# Altium PCB frontpanel.PcbDoc
Units mil, origin at the board's own origin, x right, y up, seen from the top; angles counter-clockwise.
Board outline 5533.65 x 2545.46 mil, 2 copper layers (Top Layer, Bottom Layer); 17 components, 16 nets, 69 pads, 8 vias.
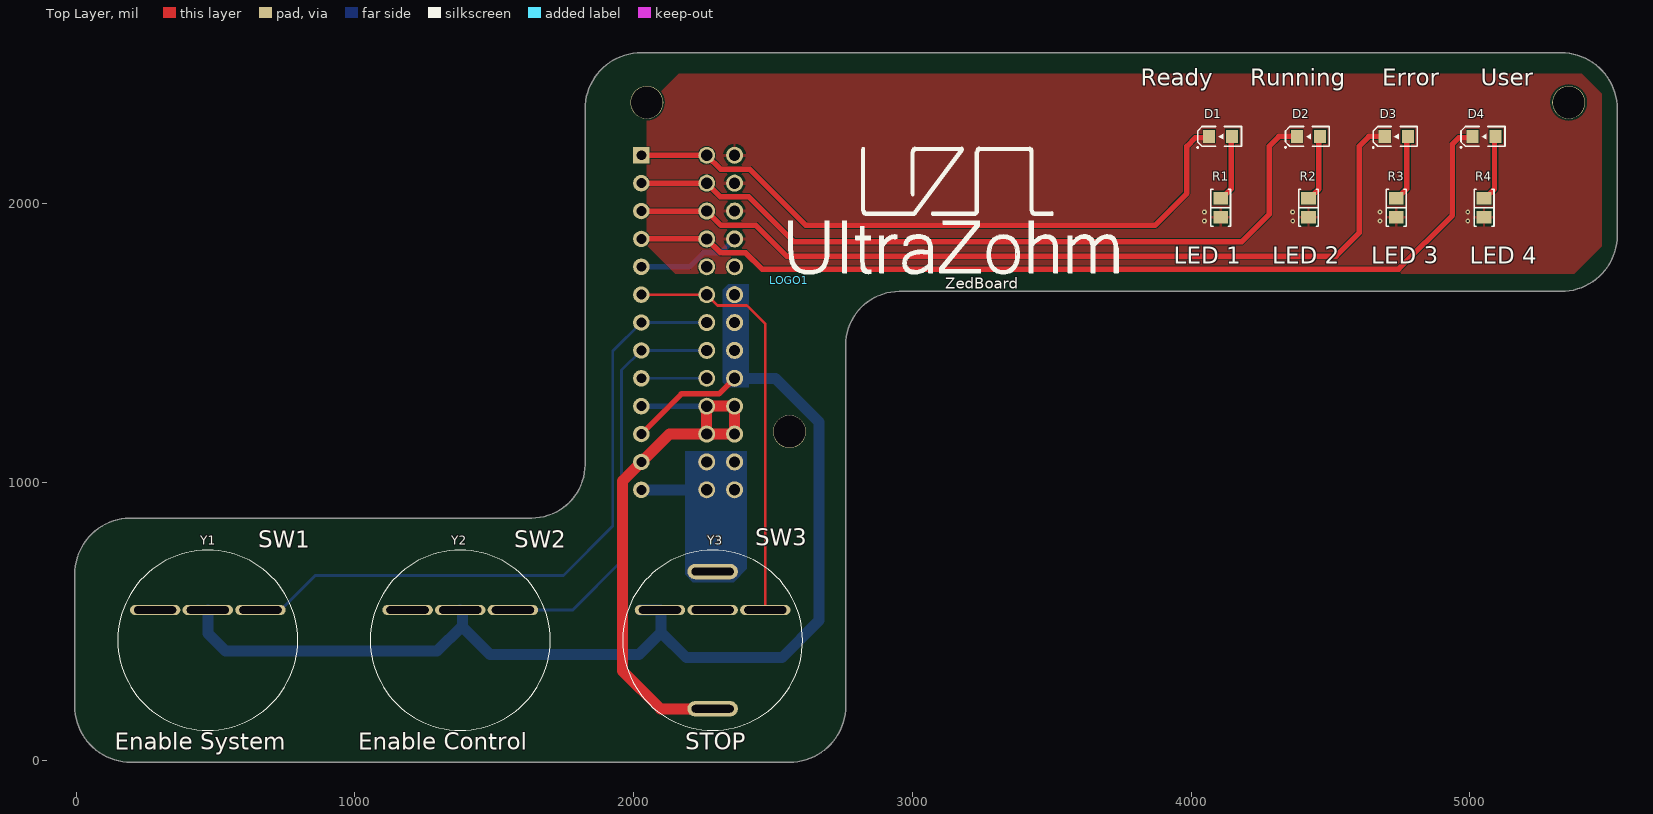
[diagram p0: Top Layer view]
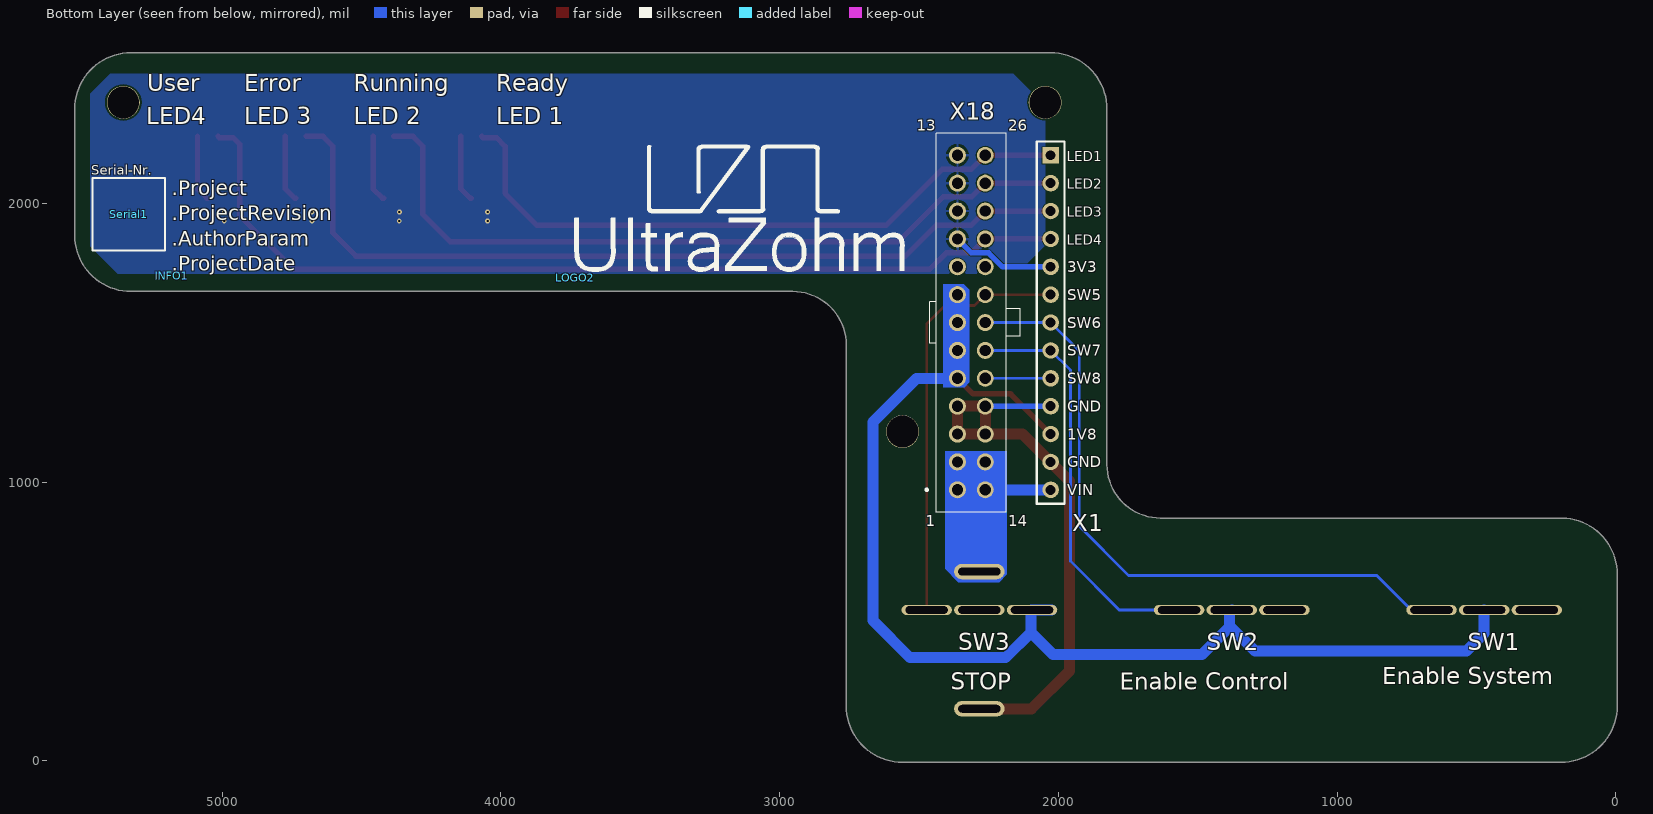
[diagram p1: Bottom Layer view, seen from below]
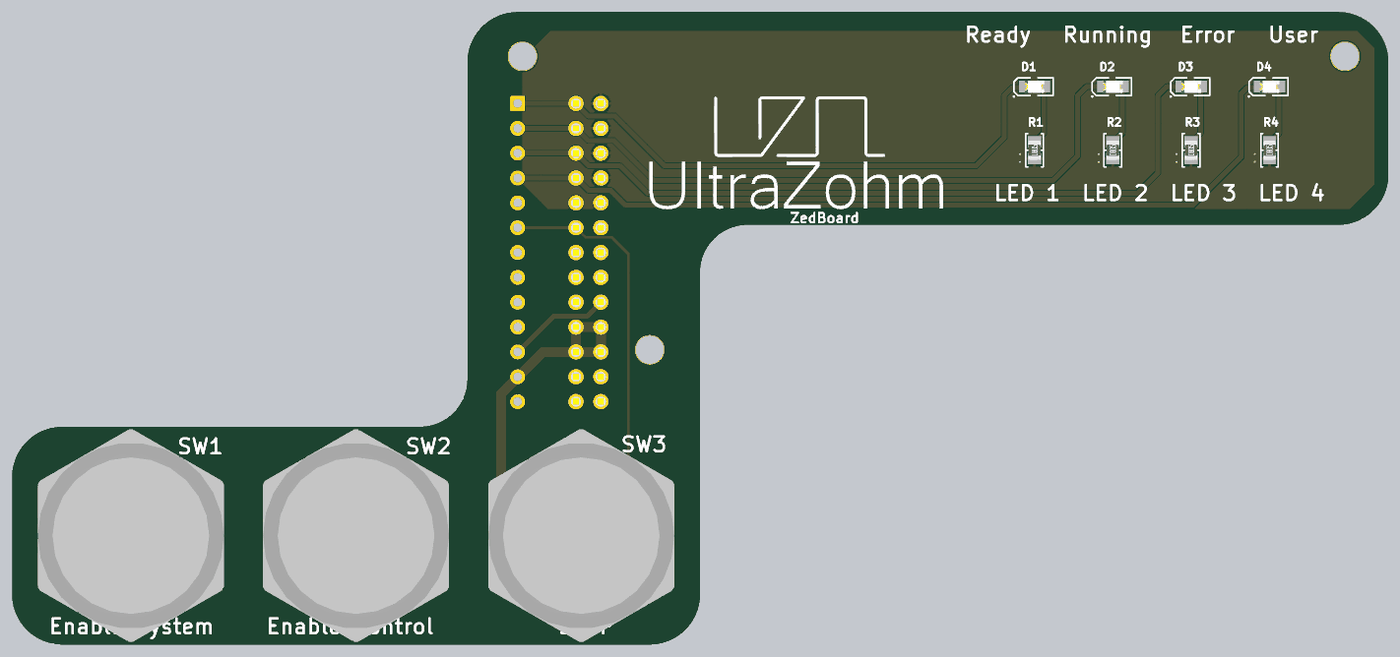
[diagram p2: 3D render of the assembled board from above, using the file's embedded part models]

## Layer stack, top to bottom
Top Solder: solder mask 0.4, Solder Resist, Dk 3.5
Top Layer: signal copper 1.4
Dielectric 1: dielectric 12.6, FR-4, Dk 4.8
Bottom Layer: signal copper 1.4
Bottom Solder: solder mask 0.4, Solder Resist, Dk 3.5

## Board outline
-5.01,196.85 -5.01,669.29 cw(c196.85,669.29) 192.18,871.1 cw(c192.91,866.14) 192.91,871.16 196.9,871.16 1633.86,871.16 ccw(c1633.86,1062.99) 1825.69,1062.99 1825.69,2338.58 cw(c2027.56,2338.58) 2027.5,2540.45 cw(c2027.56,2535.43) 2027.56,2540.45 5326.77,2540.45 cw(c5326.77,2535.43) 5326.83,2540.45 cw(c5326.77,2338.58) 5528.64,2338.58 5528.64,1885.83 cw(c5326.77,1885.83) 5326.77,1683.96 2952.79,1683.96 cw(c2952.76,1688.98) 2952.76,1683.96 ccw(c2952.76,1492.13) 2760.92,1492.13 2760.92,196.85 cw(c2559.06,196.85) 2559.06,-5.01 196.9,-5.01 cw(c196.85,0) 196.85,-5.01 cw(c196.85,196.85)

## Design rules (kind name [scope] priority, off if disabled: settings)
Clearance [All] p1: gap=3.54 ignorepadtopadclearanceinfootprint=FALSE except(0: Arc-Text Track-Text SMDPad-Text THPad-Text Via-Text Fill-Text Poly-Text Region-Text Text-Text; 5: Arc-SMDPad Arc-Via Track-SMDPad Track-Via SMDPad-SMDPad SMDPad-Via THPad-Via Via-Via; 7.87: Arc-Hole Track-Hole SMDPad-Hole THPad-Hole Via-Hole Fill-Hole Poly-Hole Region-Hole Text-Hole)
Height [All] p1: minheight=0 maxheight=71591.89 prefheight=0
HoleSize [All] p1: absolutevalues=TRUE maxlimit=157.48 minlimit=1 maxpercent=80.000 minpercent=20.000
PolygonConnect [All] p1: thpad.connectstyle=Relief thpad.reliefconductorwidth=10 thpad.reliefentries=4 thpad.polygonreliefangle="90 Angle" thpad.airgapwidth=10 smdpad.connectstyle=Relief smdpad.reliefconductorwidth=10 smdpad.reliefentries=4 smdpad.polygonreliefangle="90 Angle" smdpad.airgapwidth=10 via.connectstyle=Direct via.reliefconductorwidth=10 via.reliefentries=4 via.polygonreliefangle="90 Angle" via.airgapwidth=10
RoutingVias [All] p1: holewidth=11.81 width=23.62 viastyle="Through Hole" minholewidth=7.87 minwidth=17.72 maxholewidth=31.5 maxwidth=62.99
SolderMaskExpansion SolderMaskExpansion_Trenz [All] p1: expansion=0 istentingtop=FALSE
SolderMaskExpansion [All] p2: expansion=4 istentingtop=FALSE
Width [All] p1: maxlimit=39.37 minlimit=7.87 preferedwidth=10
28 further rules are at their usual default settings.

## Components (designator, comment, footprint, x,y, rotation, side; value= is the part's Value field where it differs from the comment)
D1 "150080GS75000" LEDM2012X80N 4105.91,2240.16 r0 top
D2 "150080GS75000" LEDM2012X80N 4420.87,2240.16 r0 top
D3 "150080RS75000" LEDM2012X80N 4735.83,2240.16 r0 top
D4 "150080GS75000" LEDM2012X80N 5050.79,2240.16 r0 top
INFO1 "Design Information" Design_info 5181.1,1740.16 r180 bottom
LOGO1 "UZ Logo" UZ_Logo_small 2559.06,1724.41 r0 top value=Logo
LOGO2 "UZ Logo" UZ_Logo_small 3732.28,1732.28 r180 bottom value=Logo
R1 "100R" "RES 0805_2012" 4105.91,1984.25 r90 top
R2 "100R" "RES 0805_2012" 4420.87,1984.25 r90 top
R3 "100R" "RES 0805_2012" 4735.83,1984.25 r90 top
R4 "100R" "RES 0805_2012" 5050.79,1984.25 r90 top
Serial1 "Serialnumber 6.3 x 6.3 mm" SERIAL_6.3X6.3MM 5334.65,1960.63 r180 bottom value=REV
X1 "Header 13" HDR1X13 2027.56,2172.44 r270 bottom
X18 "IPL1-113-01-XX-D-K" IPL1-113-01-XX-D-K 2362.2,972.44 r90 bottom
Y1 "P16-TF" P16-TF 472.44,433.07 r0 top
Y2 "P16-TF" P16-TF 1377.95,433.07 r0 top
Y3 "P16-TF-R" P16-TF-R 2283.46,433.07 r0 top

## Footprints (in the part's own frame and the unit in brackets; to place one, negate y for a bottom-side part, rotate by r counter-clockwise, add the part's x,y. Pads: shape width x height; smd on the part's side, far side on the other; paste and mask are expansions set on the pad)
Design_info [mil] "Design information about the PCB"
HDR1X13 [mm] "Connector; Header; 13 Position"
  rect 1.5x1.5 hole 0.9: 1(0,0)
  round 1.5 hole 0.9: 2(2.54,0) 3(5.08,0) 4(7.62,0) 5(10.16,0) 6(12.7,0) 7(15.24,0) 8(17.78,0) 9(20.32,0) 10(22.86,0) 11(25.4,0) 12(27.94,0) 13(30.48,0)
  silkscreen extent -1.27,-1.27 31.75,1.27
IPL1-113-01-XX-D-K [mm]
  round 1.55 hole 1.02: 1(0,0) 2(2.54,0) 3(5.08,0) 4(7.62,0) 5(10.16,0) 6(12.7,0) 7(15.24,0) 8(17.78,0) 9(20.32,0) 10(22.86,0) 11(25.4,0) 12(27.94,0) 13(30.48,0) 14(0,-2.54) 15(2.54,-2.54) 16(5.08,-2.54) 17(7.62,-2.54) 18(10.16,-2.54) 19(12.7,-2.54) 20(15.24,-2.54) 21(17.78,-2.54) 22(20.32,-2.54) 23(22.86,-2.54) 24(25.4,-2.54) 25(27.94,-2.54) 26(30.48,-2.54)
  silkscreen extent -2.03,-5.72 32.51,2.89, body extent -2.03,-5.46 32.51,2.41, height 8.13
LEDM2012X80N [mm]
  rect 1.1x1.2 smd: 1(-1.05,0) 2(1.05,0)
  silkscreen extent -2.16,-1.06 1.9,0.9, body extent -1,-0.62 1,0.63, height 0.7
P16-TF [mm]
  oval 4.6x0.916 hole 0.687 slot 3.844 at 0 deg: C(4.8,2.75) NC(-4.8,2.75) NO(0,2.75)
  silkscreen extent -8.2,-8.2 8.2,8.2, body extent -9.5,-10.85 9.5,10.85, height 33
P16-TF-R [mm]
  oval 4.6x1.4 hole 0.687 slot 3.844 at 0 deg: +(0,6.25) -(0,-6.25)
  oval 4.6x0.916 hole 0.687 slot 3.844 at 0 deg: C(4.8,2.75) NC(-4.8,2.75) NO(0,2.75)
  silkscreen extent -8.2,-8.2 8.2,8.2, body extent -9.5,-10.85 9.5,10.85, height 33
"RES 0805_2012" [mm] "Chip Resistor, 2-Leads, Body 2.00x1.25mm, IPC Medium Density"
  rect 1.15x1.35 smd: 1(-0.875,0) 2(0.875,0)
  silkscreen extent -1.7,-0.9 1.7,0.9, body extent -1,-0.62 1,0.63, height 0.6
SERIAL_6.3X6.3MM [mil]
  silkscreen extent -130,-130 130,130
UZ_Logo_small [mil] "logo width 3cm"
  silkscreen extent -2,22 1179,477

## Part data
D1 D2 D4: "WL-SMCW SMD Mono-color Chip LED Waterclear Green 0805", Color=green, Device Package=0805, Forward Current I_f="20 mA", Forward Voltage U_f="3.2 V", LCSC Part #=C2297, Manufacturer="Wuerth Elektronik", Nominal Power="105 mW", Operating Temperature="-40 - 85 °C", Supplier Part Number 1=710-150080GS75000, Component Type="LED Diode", ComponentLink1Description=Datasheet, ComponentLink1URL=https://www.mouser.de/datasheet/2/445/150080GS75000-1715657.pdf, Created from=MGremer, Created On="08.12.2020 10:52:57", Last Updated="02.11.2021 13:03:08", Light Intensity="450 mcd", Live Cycle Status=1, Manufacturer Part Number=150080GS75000, Mounting Type=SMD, PartID=11, Stock number="not stored", Supplier 1=Mouser, Type=Standard, Wavelength="520 nm"
D3: "WL-SMCW SMD Mono-color Chip LED Waterclear Red 0805", Color=red, Device Package=0805, Forward Current I_f="20 mA", Forward Voltage U_f="2 V", LCSC Part #=C84256, Manufacturer="Wuerth Elektronik", Nominal Power="72 mW", Operating Temperature="-40 - 85 °C", Supplier Part Number 1=710-150080RS75000, Component Type="LED Diode", ComponentLink1Description=Datasheet, ComponentLink1URL=https://www.mouser.de/datasheet/2/445/150080RS75000-1714740.pdf, Created from=MGremer, Created On="08.12.2020 10:52:57", Last Updated="03.03.2021 09:59:52", Light Intensity="150 mcd", Live Cycle Status=1, Manufacturer Part Number=150080RS75000, Mounting Type=SMD, PartID=12, Stock number="not stored", Supplier 1=Mouser, Type=Standard, Wavelength="625 nm"
INFO1: Manufacturer=UltraZohm, Supplier Part Number 1=-, ComponentLink1Description=https://docs.ultrazohm.com/, ComponentLink1URL=homepage, Component Type="Design Information", Created from=MGremer, Created On="03.11.2021 09:04:23", Last Updated="03.11.2021 09:28:34", Live Cycle Status=1, Manufacturer Part Number="Design Information", PartID=12, Supplier 1=-, Type="Design Information"
LOGO1 LOGO2: library part "Logo small", Manufacturer=UltraZohm, Supplier Part Number 1=-, ComponentLink1Description=https://docs.ultrazohm.com/, ComponentLink1URL=homepage, Component Type=Logo, Created=Jan2021_Liegmann, Created from=MGremer, Created On="03.11.2021 09:04:23", Last Updated="03.11.2021 09:05:50", Live Cycle Status=1, Manufacturer Part Number="Logo small", PartID=10, Supplier 1=-, Type=Logo
R1 R2 R3 R4: library part CR0805-FX-2200ELF, "SMD resistor 1%", Device Package=0805, LCSC Part #=C17408, Manufacturer=Bourns, Manufacturer Part Number=CR0805FX-1000ELF, Supplier Part Number 1=652-CR0805FX-1000ELF, Tolerance=1%, Component Type="SMD resistor", ComponentLink1Description=Datasheet, ComponentLink1URL=https://www.mouser.de/datasheet/2/54/crxxxxx-1858361.pdf, Created from=MGremer, Created On="14.12.2020 16:17:14", Last Updated="14.12.2020 18:22:52", Live Cycle Status=1, Mounting Type=SMD, PartID=199, Stock number="not stored", Supplier 1=Mouser, Type=Resistor
Serial1: library part "Serial Number", "Serial Number", Manufacturer=UltraZohm, Supplier Part Number 1=-, ComponentLink1Description=https://docs.ultrazohm.com/, ComponentLink1URL=homepage, Component Type="Serial Number", Created=2018_09_18_AGeiger, Created from=MGremer, Created On="03.11.2021 09:04:23", Last Updated="03.11.2021 09:28:34", Live Cycle Status=1, Manufacturer Part Number="Serial Number", PartID=11, Supplier 1=-, Type="Serial Number"
X1: "Header, 13-Pin", LatestRevisionDate=17-Jul-2002, LatestRevisionNote="Re-released for DXP Platform.", Publisher="Altium Limited"
X18: "2.54 mm Double Row Termin Assembly (THT)", Case=IPL1, Device Package=Connector, Manufacturer=SAMTEC, Supplier Part Number 1=IPL1-113-01-L-D-K, Temperature-Range=-55/+125, AN=30828, ComponentLink1Description=Homepage, ComponentLink1URL=https://www.samtec.com/products/ipl1, Component Type="Samtec Connector", Created from=MGremer, Created On="30.11.2020 10:38:50", Extra="Connector Header IPL1, 2-row 26pos, key polarization, SMT 0°", H-ART=IPL1-113-02-L-D-K, HelpURL=b:\AD\adlib\datasheet\Samtec\IPL1-SMT\, Last Updated="04.11.2021 06:39:07", Live Cycle Status=1, Manufacturer Part Number=IPL1-113-01-XX-D-K, Mixed=SMT, Mounting Type=THT, Number of positions=13, Number of rows=2, PartID=52, Stock number="not stored", Supplier 1=SAMTEC, Type=Connector
Y1 Y2: "Stainless steel push botton 0.63 inch flat", Device Package=THT, Manufacturer=Metzler, ComponentLink1Description=Datasheet, ComponentLink1URL=https://www.led-taster.de/mediafiles/Sonstiges/Datenblatt_LED_Drucktaster_6-24V.pdf, ComponentLink2Description=Homepage, ComponentLink2URL=https://www.led-taster.de/Edelstahl-Drucktaster-O16mm-Flach, Component Type="push button", Created from=MGremer, Created On="02.03.2021 14:59:37", Last Updated="18.08.2021 09:35:14", Live Cycle Status=1, Manufacturer Part Number=P16-TF, Minimum Order=1, Mounting Type=THT, PartID=8, Stock number="not stored", Supplier 1=Metzler, Supplier Part Number 1=P16-TF, Type="push button"
Y3: "Stainless steel push botton 0.63 inch flat LED Ring red", Device Package=THT, Manufacturer=Metzler, ComponentLink1Description=Datasheet, ComponentLink1URL=https://www.led-taster.de/mediafiles/Sonstiges/Datenblatt_LED_Drucktaster_6-24V.pdf, ComponentLink2Description=Homepage, ComponentLink2URL=https://www.led-taster.de/O16mm-flacher-Edelstahl-Taster-mit-roter-LED-Ringbeleuchtung, Component Type="LED push button", Created from=MGremer, Created On="02.03.2021 14:59:37", Last Updated="18.08.2021 09:33:57", Live Cycle Status=1, Manufacturer Part Number=P16-TF-R, Minimum Order=1, Mounting Type=THT, PartID=7, Stock number="not stored", Supplier 1=Metzler, Supplier Part Number 1=P16-TF-R, Type="LED push button red"

## Free pads (board coordinates)
  round 118.11 hole 114.17 unplated: hole(2047.24,2362.2) hole(2559.06,1181.1) hole(5354.33,2362.2)

## Via types
v1: diameter 17.72, hole 7.87, Top Layer to Bottom Layer, tented both sides, 8 vias

## Nets (pads, with @x,y where several pads share a name; then routed paths per layer and width w, separated by ;. In a path a pad name is that pad's centre, name@x,y a point inside that pad or via, vN(x,y) a via of type N, cw(c..) or ccw(c..) an arc to the next point about the centre after c; other vN are vias at no path point)
1V8_PER: X1.11 X18.5 X18.6 X18.7 X18.8 Y1.NO Y2.NO Y3.NC | length 4219
  Top Layer w20: X1.11 2171.61,1316.5 2306.26,1316.5 X18.5
  Bottom Layer w39.37: Y1.NO 472.44,456.69 535.43,393.7 1295.28,393.7 1383.86,482.28 ; Y2.NO 1385.83,533.46 1385.83,480.31 1484.25,381.89 2019.69,381.89 2098.43,460.63 ; Y3.NC@2025.28,541.34 Y3.NC 2096.77,541.34 2098.43,539.68 2098.43,460.63 ; X18.5 2508.33,1372.44 2665.35,1215.41 2665.35,503.94 2531.5,370.08 2188.98,370.08 2098.43,460.63
3V3_PER: R1.1 R2.1 R3.1 R4.1 X1.5 X18.10 X18.11 X18.12 X18.13 | length 376.1
  Bottom Layer w19.68: X1.5 2200.12,1772.44 2249.94,1822.25 2312.02,1822.25 X18.10
  other v1: 4047.24,1937.01 4364.39,1937.01 4677.17,1937.01 4992.13,1937.01 4047.24,1968.5 4364.19,1968.5 4677.17,1968.5 4992.13,1968.5
FrontPanel_LED1: D1.1 X1.1 X18.26 | length 2376.2
  Top Layer w19.68: X1.1 X18.26 2312.6,2122.05 2417.32,2122.05 2618.11,1921.26 2685.04,1921.26 3870.08,1921.26 3984.25,2035.43 3984.25,2204.72 4015.35,2235.83 4064.17,2235.83 D1.1@4068.5,2240.16
FrontPanel_LED2: D2.1 X1.2 X18.25 | length 2742.5
  Top Layer w19.68: X1.2 X18.25 2311.02,2023.62 2413.39,2023.62 2574.8,1862.2 2622.05,1862.2 4181.1,1862.2 4279.53,1960.63 4279.53,2204.72 4314.96,2240.16 D2.1@4383.46,2240.16
FrontPanel_LED3: D3.1 X1.3 X18.24 | length 3097.7
  Top Layer w19.68: X1.3 X18.24 2313.39,1921.26 2438.98,1921.26 2549.21,1811.02 2625.98,1811.02 4519.69,1811.02 4602.36,1893.7 4602.36,2204.72 4637.8,2240.16 D3.1@4698.43,2240.16
FrontPanel_LED4: D4.1 X1.4 X18.23 | length 3378.2
  Top Layer w19.68: X1.4 X18.23 2311.81,1822.83 2401.57,1822.83 2460.63,1763.78 2614.17,1763.78 4744.09,1763.78 4937.01,1956.69 4937.01,2212.88 4960.24,2236.11 5009.33,2236.11 D4.1@5013.39,2240.16
FrontPanel_switch5: X1.6 X18.21 Y3.C | length 1519.7
  Top Layer w10: X1.6 X18.21 2301.26,1633.39 2405.98,1633.39 2472.44,1566.93 Y3.C Y3.C@2476.38,545.28
FrontPanel_switch6: X1.7 X18.20 Y1.C | length 2395.5
  Bottom Layer w10: Y1.C 733.94,541.34 857.95,665.35 1748.03,665.35 1925.2,842.52 1925.2,1470.08 X1.7 X18.20
FrontPanel_switch7: X1.8 X18.19 Y2.C | length 1482.2
  Bottom Layer w10: Y2.C 1781.5,541.34 1956.69,716.54 1956.69,1401.57 X1.8 X18.19
FrontPanel_switch8: X1.9 X18.18 | length 234.6
  Bottom Layer w10: X1.9 X18.18
GND: X1.10 X1.12 X18.3 X18.4 X18.16 X18.17 Y3.- | length 2066.2
  Top Layer w39.37: Y3.- 2096.46,187.01 1960.63,322.83 1960.63,1003.94 2129.13,1172.44 X18.16 ; X18.16 X18.17 X18.4 X18.3 X18.16
  Bottom Layer w19.68: X1.10 X18.17
NetD1_2: D1.2 R1.2 | length 239.3
  Top Layer w19.68: R1.2 4109.84,2018.7 4143.31,2052.17 D1.2@4143.31,2240.16
NetD2_2: D2.2 R2.2 | length 239.3
  Top Layer w19.68: R2.2 4424.8,2018.7 4458.27,2052.17 D2.2@4458.27,2240.16
NetD3_2: D3.2 R3.2 | length 239.3
  Top Layer w19.68: R3.2 4739.76,2018.7 4773.23,2052.17 D3.2@4773.23,2240.16
NetD4_2: D4.2 R4.2 | length 239.3
  Top Layer w19.68: R4.2 5054.72,2018.7 5088.19,2052.17 D4.2@5088.19,2240.16
VIN: X1.13 X18.1 X18.2 X18.14 X18.15 Y3.+ | length 270.7
  Bottom Layer w39.37: X1.13 X18.14 ; Y3.+ Y3.+@2319.5,679.13
pads on no net: X18.9 X18.22 Y1.NC Y2.NC Y3.NO

## Polygon pours and split planes (outlines as drawn)
3V3_PER on Top Layer "TOP_3V3_PER" (solid, pour order 14): 2047.24,2350.39 2161.42,2464.57 5401.57,2464.57 5472.44,2393.7 5472.44,1846.46 5374.02,1748.03 2149.61,1748.03 2047.24,1850.39
3V3_PER on Bottom Layer "BOT_3V3_PER" (solid, pour order 15): 2047.24,2350.39 2161.42,2464.57 5401.57,2464.57 5472.44,2393.7 5472.44,1846.46 5374.02,1748.03 2149.61,1748.03 2047.24,1850.39

## Other copper
Bottom Layer:
  region net 1V8_PER: 2318.9,1690.94 2338.58,1710.63 2413.39,1710.63 2413.39,1340.55 2336.61,1340.55 2318.9,1358.27
  region net VIN: 2185.04,1110.24 2405.51,1110.24 2405.51,688.98 2358.27,641.73 2212.6,641.73 2185.04,669.29

## Silkscreen, mask and mechanical layers (free items; w line width, h text height)
Top Overlay:
  text "Ready" at 3818.9,2421.26 h60
  text "Running" at 4212.6,2421.26 h60
  text "Error" at 4685.04,2421.26 h60
  text "User" at 5039.37,2421.26 h60
  text "LED 1" at 3937.01,1783.46 h60
  text "LED 2" at 4291.34,1783.46 h60
  text "LED 3" at 4645.67,1783.46 h60
  text "LED 4" at 5000,1783.46 h60
  text "ZedBoard" at 3118.11,1692.91 h39.37
  text "SW3" at 2437.01,771.65 h60
  text "SW1" at 653.54,763.78 h60
  text "SW2" at 1570.87,763.78 h60
  text "Enable System" at 137.8,39.37 h60
  text "Enable Control" at 1011.81,39.37 h60
  text "STOP" at 2185.04,39.37 h60
Bottom Overlay:
  text "Ready" at 4015.75,2401.57 h60
  text "Running" at 4527.56,2401.57 h60
  text "Error" at 4921.26,2401.57 h60
  text "User" at 5267.72,2401.57 h60
  text "LED 1" at 4015.75,2283.46 h60
  text "LED 2" at 4527.56,2283.46 h60
  text "LED 3" at 4921.26,2283.46 h60
  text "LED4" at 5271.65,2283.46 h60
  text "26" at 2179.33,2260.24 h39.37
  text "13" at 2507.87,2260.24 h39.37
  text "LED1" at 1969.29,2151.97 h35.43
  text "LED2" at 1969.29,2051.97 h35.43
  text "LED3" at 1969.29,1951.97 h35.43
  text "LED4" at 1969.29,1851.97 h35.43
  text "3V3" at 1968.5,1752.76 h39.37
  text "SW5" at 1968.5,1652.76 h39.37
  text "SW6" at 1968.5,1552.76 h39.37
  text "SW7" at 1968.5,1452.76 h39.37
  text "SW8" at 1968.5,1352.76 h39.37
  text "GND" at 1968.5,1252.76 h39.37
  text "1V8" at 1968.5,1152.76 h39.37
  text "GND" at 1968.5,1052.76 h39.37
  text "VIN" at 1968.5,952.76 h39.37
  text "14" at 2179.81,842.27 h39.37
  text "1" at 2476.38,842.27 h39.37
  text "SW1" at 531.5,397.64 h60
  text "SW2" at 1468.5,397.64 h60
  text "SW3" at 2358.27,397.64 h60
  text "Enable System" at 838.58,275.59 h60
  text "Enable Control" at 1779.53,255.91 h60
  text "STOP" at 2385.83,255.91 h60
Mechanical 1:
  lines w10: 192.91,866.14 1633.86,866.14 ccw(c1633.86,1062.99) 1830.71,1062.99 1830.71,2338.58 cw(c2027.56,2338.58) 2027.56,2535.43 5326.77,2535.43 cw(c5326.77,2338.58) 5523.62,2338.58 5523.62,1885.83 cw(c5326.77,1885.83) 5326.77,1688.98 2952.76,1688.98 ccw(c2952.76,1492.13) 2755.91,1492.13 2755.91,196.85 cw(c2559.06,196.85) 2559.06,0 196.85,0 cw(c196.85,196.85) 0,196.85 0,669.29 cw(c196.85,669.29) 196.85,866.14

## Dimensions
2559.06,0 to 5326.77,2535.43 on Mechanical 1
5326.77,2535.43 to 5326.77,1688.98 on Mechanical 1
196.85,0 to 192.91,866.14 on Mechanical 1
1830.71,2338.58 to 2755.91,1492.13 on Mechanical 1
0,669.29 to 1830.71,2338.58 on Mechanical 1
0,196.85 to 5523.62,2338.58 on Mechanical 1

## Text inside footprints (layer, text, board x,y; h text height)
Serial1: Bottom Overlay "Serial-Nr." at 5468.9,2090.94 h59.06; Bottom Assembly "SerialNr" at 5433.07,2027.56 h27.56